# EAGLE board Rover Optical Dust Sensor (EAGLE 7.1.0)

Size 12.7 x 25.4 mm. Coordinates in mm from the lower left corner, seen from the top.
Outline: 0,24.13 0,1.27 arc90 1.27,0 11.43,0 arc90 12.7,1.27 12.7,24.13 arc90 11.43,25.4 1.27,25.4 arc90 0,24.13
Copper layers (1*16): Top 0.035mm / dielectric 1.5mm / Bottom 0.035mm
Design rules "default": minimum track width 10mil, minimum drill 24mil, track to track 8mil, track to pad 8mil, pad to pad 8mil, via to via 8mil, smd to smd 8mil, copper to edge 40mil, drill to drill 8mil, minimum pad ring 10mil, minimum via ring 8mil, stop-mask expansion 4mil, vias tented up to drill 0mil, thermal gap 10mil
Holes 3 mm at 10.16,22.86 2.54,22.86

## Footprints (pad centres in the part's own frame; a part is rotated, then mirrored left to right if it is on the bottom)
CPOL-RADIAL-100UF-25V = drill 0.7 pad 1.651 square: 1 1.27,0 | drill 0.7 pad 1.651: 2 -1.27,0
M-1X04-0.1-PTH = drill 1.016 pad 1.88: 1 -3.81,0; 2 -1.27,0; 3 1.27,0; 4 3.81,0
M-1X06-0.1-PTH = drill 1.016 pad 1.88: 1 -6.35,0; 2 -3.81,0; 3 -1.27,0; 4 1.27,0; 5 3.81,0; 6 6.35,0
M-1X02-0.1-PTH = drill 1.016 pad 1.88: 1 -1.27,0; 2 1.27,0
R0603 = smd 1 x 1.1: 1 -0.85,0; 2 0.85,0
PAD-JUMPER-3-2OF3_NC_BY_PASTE_YES_SILK_FULL_BOX = smd 0.635 x 1.27: 1 -0.813,0; 2 0,0; 3 0.813,0
SO08-EIAJ = smd 0.61 x 2.21: 1 -1.905,-3.378; 2 -0.635,-3.378; 3 0.635,-3.378; 4 1.905,-3.378; 5 1.905,3.353; 6 0.635,3.353; 7 -0.635,3.353; 8 -1.905,3.353

## Placement (x,y rotation side)
C1  220uF  [CPOL-RADIAL-100UF-25V]  6.35,19.05 180 top
J1  [M-1X04-0.1-PTH]  1.27,12.7 90 top
J2  [M-1X06-0.1-PTH]  11.43,12.7 270 top
J3  [M-1X02-0.1-PTH]  3.81,1.27 180 top
J4  [M-1X02-0.1-PTH]  8.89,1.27 0 top
R1  10k  [R0603]  6.35,6.99 0 top
R2  150  [R0603]  8.89,15.24 270 top
SJ1  JUMPER-PAD-3-2OF3_NC_BY_PASTE  [PAD-JUMPER-3-2OF3_NC_BY_PASTE_YES_SILK_FULL_BOX]  6.35,12.7 90 bottom
U1  Tiny85-20-SMT  [SO08-EIAJ]  5.71,12.7 0 top

## Library data of the parts
C1 SJ1 = SparkFun-Passives
J1-J4 R1 R2 = Jordi
U1 = SparkFun-DigitalIC; PROD_ID: IC-09092

## Nets
+3V3: J1.2 R1.2 SJ1.3 U1.8
+5V: J4.2 SJ1.1
GND: C1.2 J1.1 J2.2 J2.4 J4.1 U1.4
LED: J2.3
MISO: J3.2 U1.6
N$1: J2.1 R2.1
RST: J3.1 R1.1 U1.1
SCL: J1.4 U1.7
SDA: J1.3 U1.5
VCC: C1.1 J2.6 R2.2 SJ1.2
VO: J2.5 U1.2

## Tracks (layer width: path | path; a pad name or v marks a point on that pad's centre or on a via)
+3V3  (3 unrouted)
+5V  (1 unrouted)
GND  (5 unrouted)
MISO  (1 unrouted)
N$1  (1 unrouted)
RST  (2 unrouted)
SCL  (1 unrouted)
SDA  (1 unrouted)
VCC  (3 unrouted)
VO  (1 unrouted)